# Altium PCB HIVE_SIGHT.PcbDoc (part 1 of 2)
Units mil, origin at the board's own origin, x right, y up, seen from the top; angles counter-clockwise.
Board outline 5769.33 x 2559.52 mil, 8 copper layers (Top, GND_1, Signal_1, GND_2, PWR, Signal_2, GND_3, Bottom), stack 52.4 mil thick; 132 components, 137 nets, 371 pads, 0 vias.
Unrouted connection lines stored in the file: 245.
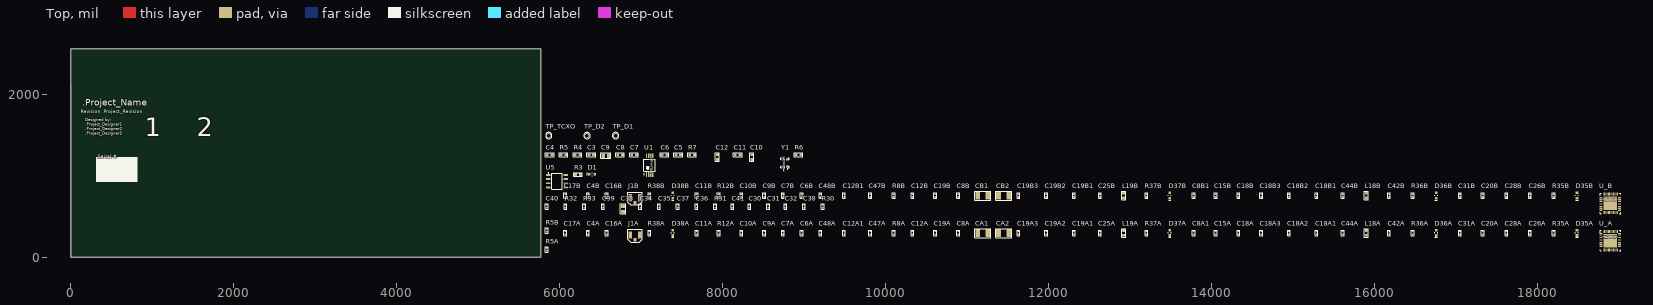
[diagram p0: Top view]
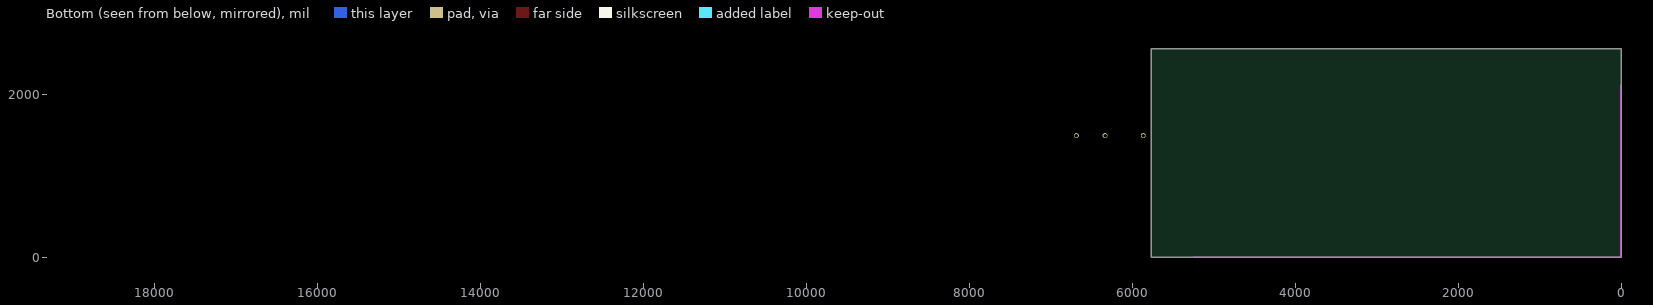
[diagram p1: Bottom view, seen from below]
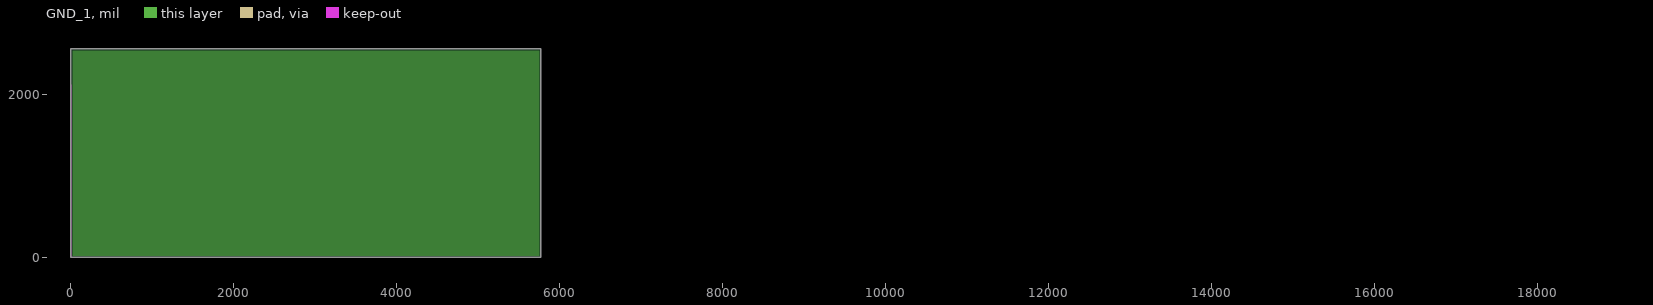
[diagram p2: GND_1, clearances drawn from the general rule]
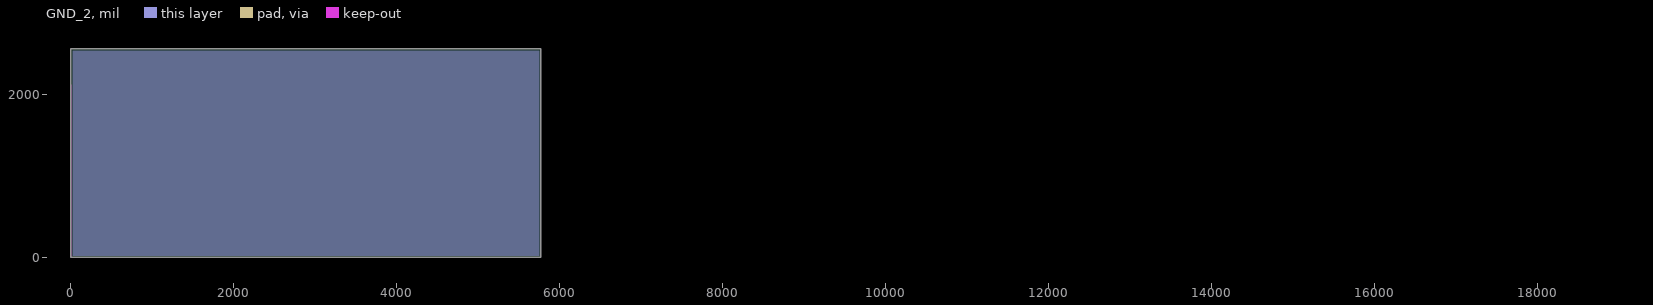
[diagram p3: GND_2, clearances drawn from the general rule]
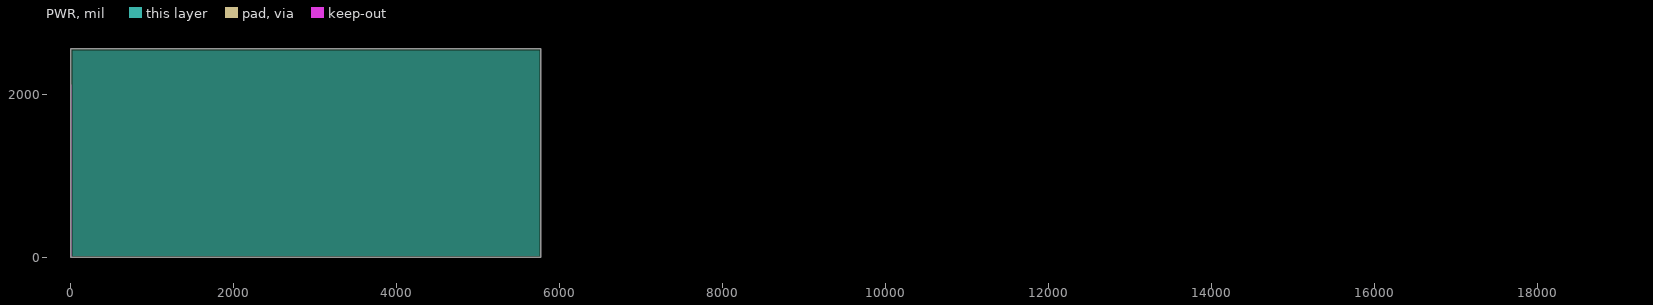
[diagram p4: PWR, clearances drawn from the general rule]
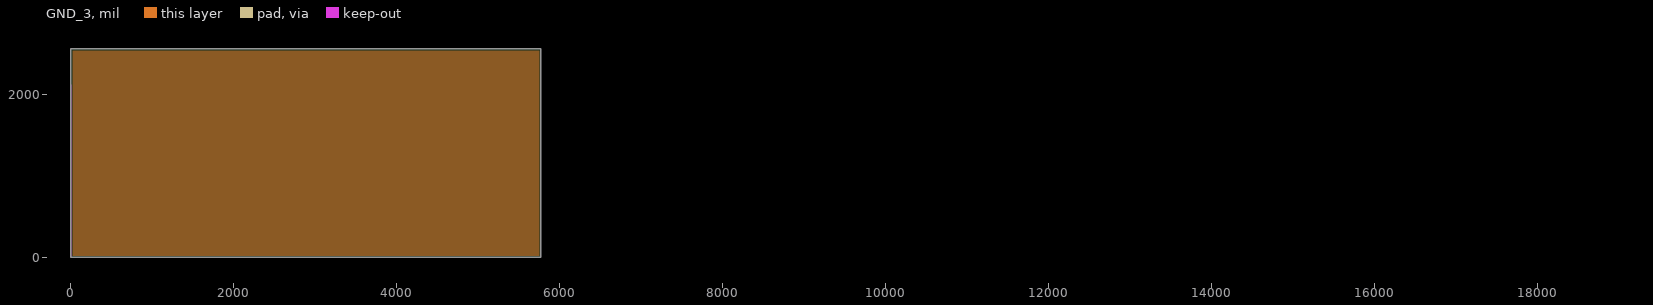
[diagram p5: GND_3, clearances drawn from the general rule]

## Layer stack, top to bottom
Top Solder: solder mask 1, Solder Resist, Dk 4
Top: signal copper 0.7
Dielectric 1: prepreg 2.8, PP-006, Dk 4.1
GND_1: plane copper 0.7
Dielectric 2: core 8, Core-009, Dk 4.5
Signal_1: signal copper 0.7
Dielectric 3: prepreg 8, PP-006, Dk 4.1
GND_2: plane copper 0.7
Dielectric 4: core 8, Core-009, Dk 4.5
PWR: plane copper 0.7
Dielectric 5: prepreg 8.3, PP-006, Dk 4.1
Signal_2: signal copper 0.7
Dielectric 6: core 8, Core-009, Dk 4.5
GND_3: plane copper 0.7
Dielectric 7: prepreg 3.7, PP-006, Dk 4.1
Bottom: signal copper 0.7
Bottom Solder: solder mask 0.6, Solder Resist, Dk 3.5

## Board outline
0,0 5769.33,0 5769.33,2559.52 0,2559.06

## Design rules (kind name [scope] priority, off if disabled: settings)
BoardOutlineClearance BoardOutlineClearance-Silk [(OnLayer('Bottom Overlay')) OR (OnLayer('Top Overlay'))] p1: gap=0 ignorepadtopadclearanceinfootprint=FALSE
BoardOutlineClearance BoardOutlineClearance-Fiducials [InComponentClass('Fiducials')] p2: gap=0 ignorepadtopadclearanceinfootprint=FALSE
BoardOutlineClearance BoardOutlineClearance-MouseBites [InComponentClass('MouseBites')] p3: gap=10 ignorepadtopadclearanceinfootprint=FALSE except(0: Arc-SplitContinuation Track-SplitContinuation SMDPad-SplitContinuation THPad-OutlineEdge THPad-CavityEdge THPad-CutoutEdge THPad-SplitBarrior THPad-SplitContinuation Via-SplitContinuation Fill-SplitContinuation Poly-SplitContinuation Region-OutlineEdge Region-CavityEdge Region-CutoutEdge Region-SplitBarrior Region-SplitContinuation Text-SplitContinuation; 20: Arc-OutlineEdge Track-OutlineEdge SMDPad-OutlineEdge Via-OutlineEdge Fill-OutlineEdge Poly-OutlineEdge Text-OutlineEdge)
BoardOutlineClearance [All] p4: gap=10 ignorepadtopadclearanceinfootprint=FALSE except(0: Arc-SplitContinuation Track-SplitContinuation SMDPad-SplitContinuation THPad-SplitContinuation Via-SplitContinuation Fill-SplitContinuation Poly-SplitContinuation Region-SplitContinuation Text-SplitContinuation)
Clearance Clearance_CON_TOP [(TouchesRoom('Ch0_Out_Down') OR TouchesRoom('Ch0_Out_Up') OR  TouchesRoom('Ch1_Out_Down') OR TouchesRoom('Ch1_Out_Up') OR  TouchesRoom('Ch2_Out_Down') OR TouchesRoom('Ch2_Out_Up') OR    TouchesRoom('Ch3_Out_Down') OR TouchesRoom('Ch3_Out_Up') OR    TouchesRoom('Ch4_Out_Down') OR TouchesRoom('Ch4_Out_Up') OR    TouchesRoom('Ch5_Out_Down') OR TouchesRoom('Ch5_Out_Up')   ) AND (InNetClass('HV') OR InNetClass('MID')) AND (OnTop OR OnMultiLayer) vs (TouchesRoom('Ch0_Out_Down') OR TouchesRoom('Ch0_Out_Up') OR  TouchesRoom('Ch1_Out_Down') OR TouchesRoom('Ch1_Out_Up') OR  TouchesRoom('Ch2_Out_Down') OR TouchesRoom('Ch2_Out_Up') OR    TouchesRoom('Ch3_Out_Down') OR TouchesRoom('Ch3_Out_Up') OR    TouchesRoom('Ch4_Out_Down') OR TouchesRoom('Ch4_Out_Up') OR    TouchesRoom('Ch5_Out_Down') OR TouchesRoom('Ch5_Out_Up')   ) AND (OnTop OR OnMultiLayer)] p1: gap=6 ignorepadtopadclearanceinfootprint=FALSE
Clearance Clearance_CON_BOT [(TouchesRoom('Ch0_In') OR TouchesRoom('Ch1_In') OR  TouchesRoom('Ch2_In') OR TouchesRoom('Ch3_In') OR  TouchesRoom('Ch4_In') OR TouchesRoom('Ch5_In') ) AND (InNetClass('HV') OR InNetClass('MID')) AND (OnBottom OR OnMultiLayer) vs (TouchesRoom('Ch0_In') OR TouchesRoom('Ch1_In') OR  TouchesRoom('Ch2_In') OR TouchesRoom('Ch3_In') OR  TouchesRoom('Ch4_In') OR TouchesRoom('Ch5_In'))   AND (OnBottom OR OnMultiLayer)] p2: gap=6 ignorepadtopadclearanceinfootprint=FALSE
Clearance Clearance_Via [IsVia vs (IsComponent AND NOT HasFootprint('REG_LDO_MIC5303-1.8YMT-TR'))] p3: gap=1 ignorepadtopadclearanceinfootprint=FALSE
Clearance HV-HV_EXT [InNetClass('HV') AND (OnTop OR OnBottom) vs InNetClass('HV') AND (OnTop OR OnBottom)] p4: gap=32 ignorepadtopadclearanceinfootprint=FALSE
Clearance HV-HV_INT [InNetClass('HV') vs InNetClass('HV')] p5: gap=16 ignorepadtopadclearanceinfootprint=FALSE
Clearance HV-MID_EXT [InNetClass('HV') AND (OnTop OR OnBottom) vs InNetClass('MID') AND (OnTop OR OnBottom)] p6: gap=16 ignorepadtopadclearanceinfootprint=FALSE
Clearance HV-MID_INT [InNetClass('HV') vs InNetClass('MID')] p7: gap=8 ignorepadtopadclearanceinfootprint=FALSE
Clearance HV-ALL_EXT [InNetClass('HV') AND (OnTop OR OnBottom) vs InNetClass('All Nets')] p8: gap=32 ignorepadtopadclearanceinfootprint=FALSE
Clearance HV-ALL_INT [InNetClass('HV') vs InNetClass('All Nets')] p9: gap=16 ignorepadtopadclearanceinfootprint=FALSE
Clearance MID-ALL_EXT [InNetClass('MID') AND (OnTop OR OnBottom) vs InNetClass('All Nets')] p10: gap=16 ignorepadtopadclearanceinfootprint=FALSE
Clearance MID_ALL_INT [InNetClass('MID') vs InNetClass('All Nets')] p11: gap=8 ignorepadtopadclearanceinfootprint=FALSE
Clearance [All] p12: gap=6 ignorepadtopadclearanceinfootprint=FALSE
ComponentClearance [All] p1: gap=4 collisioncheckmode=3 verticalgap=4 showdistances=FALSE
DiffPairsRouting [All] p1: maxlimit=6 minlimit=5 mostfreqgap=6 toplayer_mingap=6 toplayer_minwidth=4 toplayer_maxwidth=4 toplayer_prefwidth=4 midlayer1_maxgap=5 midlayer1_prefgap=5 midlayer1_minwidth=4 midlayer1_maxwidth=4 midlayer1_prefwidth=4 midlayer2_maxgap=5 midlayer2_prefgap=5 midlayer2_minwidth=4 midlayer2_maxwidth=4 midlayer2_prefwidth=4 bottomlayer_mingap=6 bottomlayer_minwidth=4 bottomlayer_maxwidth=4 bottomlayer_prefwidth=4 maxuncoupledlength=500
HoleSize [All] p1: absolutevalues=TRUE maxlimit=1000 minlimit=4 maxpercent=80.000 minpercent=20.000
HoleToHoleClearance HoleToHoleClearance_Via [All] p1: gap=16 allowstackedmicrovias=TRUE
HoleToHoleClearance [All] p2: gap=10 allowstackedmicrovias=TRUE
MatchedLengths DiffMatching_WithinPair [InDifferentialPairClass('All Differential Pairs')] p1: tolerance=1 checknetsindiffpair=TRUE checkdiffpairvsdiffpair=FALSE checkxsignals=FALSE checkothers=FALSE
MatchedLengths CHANNEL_0 [InxSignalClass('xSignals_J1A_J2A')] p2: tolerance=5 checknetsindiffpair=FALSE checkdiffpairvsdiffpair=TRUE checkxsignals=TRUE checkothers=TRUE
MatchedLengths CHANNEL_1 [InxSignalClass('xSignals_J1B_J2B')] p3: tolerance=5 checknetsindiffpair=FALSE checkdiffpairvsdiffpair=TRUE checkxsignals=TRUE checkothers=TRUE
MatchedLengths CHANNEL_2 [InxSignalClass('xSignals_J1C_J2C')] p4: tolerance=5 checknetsindiffpair=FALSE checkdiffpairvsdiffpair=TRUE checkxsignals=TRUE checkothers=TRUE
MatchedLengths CHANNEL_3 [InxSignalClass('xSignals_J1D_J2D')] p5: tolerance=5 checknetsindiffpair=FALSE checkdiffpairvsdiffpair=TRUE checkxsignals=TRUE checkothers=TRUE
MatchedLengths CHANNEL_4 [InxSignalClass('xSignals_J1E_J2E')] p6: tolerance=5 checknetsindiffpair=FALSE checkdiffpairvsdiffpair=TRUE checkxsignals=TRUE checkothers=TRUE
MatchedLengths CHANNEL_5 [InxSignalClass('xSignals_J1F_J2F')] p7: tolerance=5 checknetsindiffpair=FALSE checkdiffpairvsdiffpair=TRUE checkxsignals=TRUE checkothers=TRUE
MinimumSolderMaskSliver [All] p1: minsoldermaskwidth=3.9
PlaneClearance PlaneClearance_HV [InNetClass('HV')] p1: clearance=10
PlaneClearance PlaneClearance_HV_MID [InNet('-HV_MID')] p2: clearance=8
PlaneClearance [All] p3: clearance=6
PlaneConnect [All] p1: pad.planeconnectstyle=Relief pad.reliefexpansion=20 pad.reliefentries=4 pad.reliefconductorwidth=10 pad.reliefairgap=10 via.planeconnectstyle=Direct via.reliefexpansion=20 via.reliefentries=4 via.reliefconductorwidth=10 via.reliefairgap=10
PolygonConnect [All] p1: thpad.connectstyle=Relief thpad.reliefconductorwidth=10 thpad.reliefentries=4 thpad.polygonreliefangle="90 Angle" thpad.airgapwidth=10 smdpad.connectstyle=Direct smdpad.reliefconductorwidth=10 smdpad.reliefentries=4 smdpad.polygonreliefangle="90 Angle" smdpad.airgapwidth=10 via.connectstyle=Direct via.reliefconductorwidth=10 via.reliefentries=4 via.polygonreliefangle="90 Angle" via.airgapwidth=10
RoomDefinition DECAWAVE_3 [InComponentClass('DECAWAVE')] p1: confinementstyle=ConfineIn formatcopy=TRUE lockcomponents=FALSE outline 5814.32,819.34 6460.32,819.34 6460.32,1151.34 5814.32,1151.34
RoomDefinition DECAWAVE [InComponentClass('DECAWAVE')] p2: confinementstyle=ConfineIn formatcopy=TRUE lockcomponents=FALSE outline 5814.32,972.34 8999.32,972.34 8999.32,1394.34 5814.32,1394.34
RoomDefinition DECAWAVE [InComponentClass('DECAWAVE')] p3: confinementstyle=ConfineIn formatcopy=TRUE lockcomponents=FALSE outline 5814.32,972.34 8999.32,972.34 8999.32,1394.34 5814.32,1394.34
RoutingVias [All] p1: holewidth=10 width=18 viastyle="Through Hole" minholewidth=10 minwidth=18 maxholewidth=10 maxwidth=30
SilkToSilkClearance [All] p1: silktosilkclearance=1
SilkToSolderMaskClearance [IsPad] p1: minsilkscreentomaskgap=1 clearancetoexposedcopper=FALSE
SolderMaskExpansion [All] p1: expansion=2 istentingtop=FALSE
Width Width_POW [InNetClass('POWER')] p1: maxlimit=32 minlimit=6 preferedwidth=8 minimp=50.000000 maximp=50.000000 favimp=50.000000
Width [All] p2: maxlimit=6 minlimit=5.5 preferedwidth=6 toplayer_maxwidth=5.5 toplayer_prefwidth=5.5 midlayer1_minwidth=6 midlayer2_minwidth=6 bottomlayer_maxwidth=5.5 bottomlayer_prefwidth=5.5 minimp=50.000000 maximp=50.000000 favimp=50.000000
21 further rules are at their usual default settings.

## Classes and differential pairs
component class TOP: MEC?
component class POWER: TP_D1 TP_D2 TP_TCXO
component class DECAWAVE: C3 C4 C5 C6 C7 C8 C9 C10 C11 C12 D1 R3 R4 R5 R6 R7 U2 U3 U5

## Components (designator, comment, footprint, x,y, rotation, side; value= is the part's Value field where it differs from the comment)
C3 "0805YD106KAT2A" CAP_CER_0603 6387.32,1260.34 r0 top value=10uF
C4 "C0603C105K8PACTU" CAP_CER_0603 5877.32,1260.34 r0 top value=1uF
C4A "CC0402JRNPO9BN101" CAP_CER_0402 6348.32,301.34 r90 top value=100pF
C4B "CC0402JRNPO9BN101" CAP_CER_0402 6348.32,759.34 r90 top value=100pF
C5 "CC0603KRX7R8BB104" CAP_CER_0603 7455.32,1260.34 r0 top value=0.1uF
C6 "CC0603KRX7R8BB104" CAP_CER_0603 7285.32,1260.34 r0 top value=0.1uF
C6A "CGA2B3X7R1E104K050BB" CAP_CER_0402 8971.32,301.34 r90 top value=100nF
C6B "CGA2B3X7R1E104K050BB" CAP_CER_0402 8971.32,759.34 r90 top value=100nF
C7 "CC0603KRX7R8BB104" CAP_CER_0603 6913.32,1260.34 r0 top value=0.1uF
C7A "CGA2B3X7R1E104K050BB" CAP_CER_0402 8741.32,301.34 r90 top value=100nF
C7B "CGA2B3X7R1E104K050BB" CAP_CER_0402 8741.32,759.34 r90 top value=100nF
C8 "C0603C105K8PACTU" CAP_CER_0603 6742.32,1260.34 r0 top value=1uF
C8A "C0402C129C5GACTU" CAP_CER_0402 10891.32,301.34 r90 top value=1.2pF
C8A1 "CC0402CRNPO9BN3R0" CAP_CER_0402 13782.32,301.34 r90 top value=3pF
C8B "C0402C129C5GACTU" CAP_CER_0402 10891.32,759.34 r90 top value=1.2pF
C8B1 "CC0402CRNPO9BN3R0" CAP_CER_0402 13782.32,759.34 r90 top value=3pF
C9 "CC0603KRX7R8BB104" CAP_CER_0805 6567.32,1249.34 r0 top value=0.1uF
C9A "CGA2B3X7R1E104K050BB" CAP_CER_0402 8511.32,301.34 r90 top value=100nF
C9B "CGA2B3X7R1E104K050BB" CAP_CER_0402 8511.32,759.34 r90 top value=100nF
C10 "CC0603KRX7R8BB104" CAP_CER_0603 8356.32,1231.34 r90 top value=0.1uF
C10A "CGA2B3X7R1E104K050BB" CAP_CER_0402 8231.32,301.34 r90 top value=100nF
C10B "CGA2B3X7R1E104K050BB" CAP_CER_0402 8231.32,759.34 r90 top value=100nF
C11 "CC0603JRNPO9BN101" CAP_CER_0603 8185.32,1260.34 r0 top value=100pF
C11A "CGA2B3X7R1E104K050BB" CAP_CER_0402 7682.32,301.34 r90 top value=100nF
C11B "CGA2B3X7R1E104K050BB" CAP_CER_0402 7682.32,759.34 r90 top value=100nF
C12 "C0603C105K8PACTU" CAP_CER_0603 7936.32,1231.34 r90 top value=1uF
C12A "GRM1555C1H180GA01D" CAP_CER_0402 10331.32,301.34 r90 top value=18pF
C12A1 "CC0402KRX7R9BB821" CAP_CER_0402 9491.32,301.34 r90 top value=820pF
C12B "GRM1555C1H180GA01D" CAP_CER_0402 10331.32,759.34 r90 top value=18pF
C12B1 "CC0402KRX7R9BB821" CAP_CER_0402 9491.32,759.34 r90 top value=820pF
C15A "CGA2B3X7R1E104K050BB" CAP_CER_0402 14052.32,301.34 r90 top value=100nF
C15B "CGA2B3X7R1E104K050BB" CAP_CER_0402 14052.32,759.34 r90 top value=100nF
C16A "CC0402JRNPO9BN120" CAP_CER_0402 6578.32,301.34 r90 top value=12pF
C16B "CC0402JRNPO9BN120" CAP_CER_0402 6578.32,759.34 r90 top value=12pF
C17A "CC0402JRNPO9BN120" CAP_CER_0402 6068.32,301.34 r90 top value=12pF
C17B "CC0402JRNPO9BN120" CAP_CER_0402 6068.32,759.34 r90 top value=12pF
C18A "CC0402JRNPO9BN120" CAP_CER_0402 14332.32,301.34 r90 top value=12pF
C18A1 "CC0402KRX7R9BB102" CAP_CER_0402 15291.32,301.34 r90 top value=1nF
C18A2 "CL05B103KB5NFNC" CAP_CER_0402 14952.32,301.34 r90 top value=10nF
C18A3 "CGA2B3X7R1E104K050BB" CAP_CER_0402 14612.32,301.34 r90 top value=100nF
C18B "CC0402JRNPO9BN120" CAP_CER_0402 14332.32,759.34 r90 top value=12pF
C18B1 "CC0402KRX7R9BB102" CAP_CER_0402 15291.32,759.34 r90 top value=1nF
C18B2 "CL05B103KB5NFNC" CAP_CER_0402 14952.32,759.34 r90 top value=10nF
C18B3 "CGA2B3X7R1E104K050BB" CAP_CER_0402 14612.32,759.34 r90 top value=100nF
C19A "CC0402JRNPO9BN120" CAP_CER_0402 10611.32,301.34 r90 top value=12pF
C19A1 "CC0402KRX7R9BB102" CAP_CER_0402 12312.32,301.34 r90 top value=1nF
C19A2 "CL05B103KB5NFNC" CAP_CER_0402 11972.32,301.34 r90 top value=10nF
C19A3 "CGA2B3X7R1E104K050BB" CAP_CER_0402 11632.32,301.34 r90 top value=100nF
C19B "CC0402JRNPO9BN120" CAP_CER_0402 10611.32,759.34 r90 top value=12pF
C19B1 "CC0402KRX7R9BB102" CAP_CER_0402 12312.32,759.34 r90 top value=1nF
C19B2 "CL05B103KB5NFNC" CAP_CER_0402 11972.32,759.34 r90 top value=10nF
C19B3 "CGA2B3X7R1E104K050BB" CAP_CER_0402 11632.32,759.34 r90 top value=100nF
C20A "CGA2B3X7R1E104K050BB" CAP_CER_0402 17331.32,301.34 r90 top value=100nF
C20B "CGA2B3X7R1E104K050BB" CAP_CER_0402 17331.32,759.34 r90 top value=100nF
C25A "CGA2B3X7R1E104K050BB" CAP_CER_0402 12632.32,301.34 r90 top value=100nF
C25B "CGA2B3X7R1E104K050BB" CAP_CER_0402 12632.32,759.34 r90 top value=100nF
C26A "CGA2B3X7R1E104K050BB" CAP_CER_0402 17911.32,301.34 r90 top value=100nF
C26B "CGA2B3X7R1E104K050BB" CAP_CER_0402 17911.32,759.34 r90 top value=100nF
C28A "CGA2B3X7R1E104K050BB" CAP_CER_0402 17621.32,301.34 r90 top value=100nF
C28B "CGA2B3X7R1E104K050BB" CAP_CER_0402 17621.32,759.34 r90 top value=100nF
C30 "CL05A105KL5NRNC" CAP_CER_0402 8330.32,627.34 r90 top value=1uF
C31 "CL05A104KA5NNNC" CAP_CER_0402 8560.32,627.34 r90 top value=100nF
C31A "CGA2B3X7R1E104K050BB" CAP_CER_0402 17051.32,301.34 r90 top value=100nF
C31B "CGA2B3X7R1E104K050BB" CAP_CER_0402 17051.32,759.34 r90 top value=100nF
C32 "C0402C103M5RACTU" CAP_CER_0402 8770.32,627.34 r90 top value=10nF
C33 "GRM21BC71E106KE11L" CAP_CER_0805 6779.32,596.34 r90 top value=10uF
C34 "CL05A105KL5NRNC" CAP_CER_0402 6990.32,627.34 r90 top value=1uF
C35 "CL05A104KA5NNNC" CAP_CER_0402 7220.32,627.34 r90 top value=100nF
C36 "C0402C103M5RACTU" CAP_CER_0402 7680.32,627.34 r90 top value=10nF
C37 "C0402C103M5RACTU" CAP_CER_0402 7450.32,627.34 r90 top value=10nF
C38 "CC0402KRX7R9BB102" CAP_CER_0402 9000.32,627.34 r90 top value=1nF
C39 "CL05A104KA5NNNC" CAP_CER_0402 6530.32,627.34 r90 top value=100nF
C40 "CL05A104KA5NNNC" CAP_CER_0402 5840.32,627.34 r90 top value=100nF
C41 "CC0402CRNPO9BN3R0" CAP_CER_0402 8120.32,627.34 r90 top value=3pF
C42A "CGA2B3X7R1E104K050BB" CAP_CER_0402 16181.32,301.34 r90 top value=100nF
C42B "CGA2B3X7R1E104K050BB" CAP_CER_0402 16181.32,759.34 r90 top value=100nF
C44A "CGA2B3X7R1E104K050BB" CAP_CER_0402 15611.32,301.34 r90 top value=100nF
C44B "CGA2B3X7R1E104K050BB" CAP_CER_0402 15611.32,759.34 r90 top value=100nF
C47A "CGA2B3X7R1E104K050BB" CAP_CER_0402 9811.32,301.34 r90 top value=100nF
C47B "CGA2B3X7R1E104K050BB" CAP_CER_0402 9811.32,759.34 r90 top value=100nF
C48A "CGA2B3X7R1E104K050BB" CAP_CER_0402 9201.32,301.34 r90 top value=100nF
C48B "CGA2B3X7R1E104K050BB" CAP_CER_0402 9201.32,759.34 r90 top value=100nF
CA1 "C3225X7R1E226M250AB" CAP_CER_1210 11195.32,299.34 r0 top value=22uF
CA2 "C3225X7R1E226M250AB" CAP_CER_1210 11451.32,299.34 r0 top value=22uF
CB1 "C3225X7R1E226M250AB" CAP_CER_1210 11195.32,757.34 r0 top value=22uF
CB2 "C3225X7R1E226M250AB" CAP_CER_1210 11451.32,757.34 r0 top value=22uF
D1 "SML-D12P8WT86" LED_SML-D12P8WT86 6397.32,1021.34 r0 top value="560 nm (green)"
D35A "SML-D12P8WT86" LED_SML-D12P8WT86 18487.32,301.34 r90 top value="560 nm (green)"
D35B "SML-D12P8WT86" LED_SML-D12P8WT86 18487.32,759.34 r90 top value="560 nm (green)"
D36A "SML-D12P8WT86" LED_SML-D12P8WT86 16757.32,301.34 r90 top value="560 nm (green)"
D36B "SML-D12P8WT86" LED_SML-D12P8WT86 16757.32,759.34 r90 top value="560 nm (green)"
D37A "SML-D12P8WT86" LED_SML-D12P8WT86 13488.32,301.34 r90 top value="560 nm (green)"
D37B "SML-D12P8WT86" LED_SML-D12P8WT86 13488.32,759.34 r90 top value="560 nm (green)"
D38A "SML-D12P8WT86" LED_SML-D12P8WT86 7388.32,301.34 r90 top value="560 nm (green)"
D38B "SML-D12P8WT86" LED_SML-D12P8WT86 7388.32,759.34 r90 top value="560 nm (green)"
J1A "128-0711-201" CON_UMC_128-0711-201 6926.32,274.34 r0 top value="50 Ohm, 6 GHz"
J1B "128-0711-201" CON_UMC_128-0711-201 6926.32,732.34 r0 top value="50 Ohm, 6 GHz"
L18A "BLM15AG601SN1D" FER_0603 15901.32,301.34 r90 top value=600R@100Mhz
L18B "BLM15AG601SN1D" FER_0603 15901.32,759.34 r90 top value=600R@100Mhz
L19A "BLM15AG601SN1D" FER_0603 12922.32,301.34 r90 top value=600R@100Mhz
L19B "BLM15AG601SN1D" FER_0603 12922.32,759.34 r90 top value=600R@100Mhz
R3 "CRCW0603470RFKEAC" RES_0603 6224.32,1017.34 r0 top value=470R
R4 "RR0816P-103-D" RES_0603 6217.32,1260.34 r0 top value=10k
R5 "RC0603JR-070RL" RES_0603 6047.32,1260.34 r0 top value=0R
R5A "RC0402FR-0711KL" RES_0402 5840.32,98.34 r90 top value=11k
R5B "RC0402FR-0711KL" RES_0402 5840.32,332.34 r90 top value=11k
R6 "RC0603FR-071KL" RES_0603 8931.32,1260.34 r0 top value=1K
R7 "RC0402FR- XXXXX" RES_0603 7625.32,1260.34 r0 top value=TBD
R8A "RC0402FR-0716KL" RES_0402 10101.32,301.34 r90 top value=16k
R8B "RC0402FR-0716KL" RES_0402 10101.32,759.34 r90 top value=16k
R12A "RC0402FR-07270RL" RES_0402 7952.32,301.34 r90 top value=270
R12B "RC0402FR-07270RL" RES_0402 7952.32,759.34 r90 top value=270
R30 "RC0402FR-0720KL" RES_0402 9230.32,627.34 r90 top value=20k
R31 "RC0402FR-0720KL" RES_0402 7910.32,627.34 r90 top value=20k
R32 "RC0402FR-070RL" RES_0402 6070.32,627.34 r90 top value=0R
R33 "RC0402FR-070RL" RES_0402 6300.32,627.34 r90 top value=0R
R35A "RC0402FR-07470RL" RES_0402 18201.32,301.34 r90 top value=470
R35B "RC0402FR-07470RL" RES_0402 18201.32,759.34 r90 top value=470
R36A "RC0402FR-07470RL" RES_0402 16471.32,301.34 r90 top value=470
R36B "RC0402FR-07470RL" RES_0402 16471.32,759.34 r90 top value=470
R37A "RC0402FR-07470RL" RES_0402 13202.32,301.34 r90 top value=470
R37B "RC0402FR-07470RL" RES_0402 13202.32,759.34 r90 top value=470
R38A "RC0402FR-07470RL" RES_0402 7102.32,301.34 r90 top value=470
R38B "RC0402FR-07470RL" RES_0402 7102.32,759.34 r90 top value=470
TP_D1 "100MIL" TPO_TH_ROUND_100MIL 6686.32,1495.34 r90 top
TP_D2 "100MIL" TPO_TH_ROUND_100MIL 6335.32,1495.34 r90 top
TP_TCXO "100MIL" TPO_TH_ROUND_100MIL 5865.32,1495.34 r90 top
U1 "LMK1C1102PWR" COM_BUF_LMK1C1102PWR 7104.32,1133.34 r90 top
U5 "MX25L3233FZNI-08G" MEM_EEP_CAT24C32WI-GT3 5968.32,935.34 r0 top value="32Mb (8M x 4)"
U_A "DW1000-I-TR13" COM_XRC_DW1000-I-TR13 18896.32,205.34 r0 top
U_B "DW1000-I-TR13" COM_XRC_DW1000-I-TR13 18896.32,663.34 r0 top
Y1 "ASTXR-12-38.400MHz-514054-T" OSC_ASTXR-12-38.400MHZ-514054-T 8768.32,1159.34 r90 top value=38.4MHz

## Footprints (in the part's own frame and the unit in brackets; to place one, negate y for a bottom-side part, rotate by r counter-clockwise, add the part's x,y. Pads: shape width x height; smd on the part's side, far side on the other; paste and mask are expansions set on the pad)
CAP_CER_0402 [mil] "Ceramic Capacitor - 0402"
  rrect60% 20x20 smd paste+0 mask+1.97: 1(-17.5,0) 2(17.5,0)
  silkscreen extent -33,-17 33,17, body extent -19,-10 20,10, height 20
CAP_CER_0603 [mil] "Ceramic Capacitor - 0603"
  rrect35% 35x34 smd paste+0 mask+1.97: 1(-29.5,0) 2(29.5,0)
  silkscreen extent -53,-24 53,24, body extent -31,-16 31,16, height 35
CAP_CER_0805 [mil] "Ceramic Capacitor - 0805"
  rrect37% 43x55 smd paste+0 mask+1.97: 1(-33.5,0) 2(33.5,0)
  silkscreen extent -61,-33 61,33, body extent -39,-24 40,25, height 49
CAP_CER_1210 [mm] "Ceramic Capacitor - 1210"
  rrect40% 1.5x2.5 smd paste+0 mask+0.05: 1(-1.6,0) 2(1.6,0)
  silkscreen extent -2.5,-1.4 2.5,1.4, body extent -1.57,-1.24 1.63,1.26, height 2.5
COM_BUF_LMK1C1102PWR [mm] "TSOP, 8-Leads, Body 3,00x4,40mm, Pitch 0,65mm, IPC Medium Density"
  rrect20% 1.5x0.45 smd mask+0.05: 1(-2.9,0.975) 2(-2.9,0.325) 3(-2.9,-0.325) 4(-2.9,-0.975) 5(2.9,-0.975) 6(2.9,-0.325) 7(2.9,0.325) 8(2.9,0.975)
  silkscreen extent -3.02,-1.8 1.85,1.87, body extent -3.2,-1.55 3.2,1.55, height 1.2
COM_XRC_DW1000-I-TR13 [mm] "QFN 48 package, 0.5mm pitch"
  rect 0.95x0.2 smd mask+0.125: 1(-2.9,2.2) 2(-2.9,1.8) 3(-2.9,1.4) 4(-2.9,1) 5(-2.9,0.6) 6(-2.9,0.2) 7(-2.9,-0.2) 8(-2.9,-0.6) 9(-2.9,-1) 10(-2.9,-1.4) 11(-2.9,-1.8) 12(-2.9,-2.2) 25(2.9,-2.2) 26(2.9,-1.8) 27(2.9,-1.4) 28(2.9,-1) 29(2.9,-0.6) 30(2.9,-0.2) 31(2.9,0.2) 32(2.9,0.6) 33(2.9,1) 34(2.9,1.4) 35(2.9,1.8) 36(2.9,2.2)
  rect 0.2x0.95 smd mask+0.125: 13(-2.2,-2.9) 14(-1.8,-2.9) 15(-1.4,-2.9) 16(-1,-2.9) 17(-0.6,-2.9) 18(-0.2,-2.9) 19(0.2,-2.9) 20(0.6,-2.9) 21(1,-2.9) 22(1.4,-2.9) 23(1.8,-2.9) 24(2.2,-2.9) 37(2.2,2.9) 38(1.8,2.9) 39(1.4,2.9) 40(1,2.9) 41(0.6,2.9) 42(0.2,2.9) 43(-0.2,2.9) 44(-0.6,2.9) 45(-1,2.9) 46(-1.4,2.9) 47(-1.8,2.9) 48(-2.2,2.9)
  rect 4.2x4.2 smd: 49(0,0)
  silkscreen extent -3.27,-3.2 3.2,3.2, body extent -3.05,-3.05 3.05,3.05, height 0.9
CON_UMC_128-0711-201 [mil]
  rect 39x41 smd paste-0.98 mask+1.97: 1(0,-59.5)
  rect 41x87 smd paste-0.98 mask+1.97: 2(-58,0) 3(58,0)
  silkscreen extent -89,-89 89,69, body extent -59,-61 59,85, height 68
FER_0603 [mil] "Ferrite - 0603"
  rrect35% 35x34 smd paste+0 mask+1.97: 1(-29.5,0) 2(29.5,0)
  silkscreen extent -53,-24 53,24, body extent -31,-16 32,16, height 31
LED_SML-D12P8WT86 [mm] "0603"
  rect 0.8x0.8 smd paste-0.025 mask+0.07: A(0.825,0) K(-0.825,0)
  silkscreen extent -1.45,-0.48 0.13,0.48, body extent -0.8,-0.4 0.8,0.4, height 0.6
MEM_EEP_CAT24C32WI-GT3 [mm] "SOIC, 8-Leads, Body 4,90x3,90mm, Pitch 1,27mm, IPC Medium Density"
  rrect50% 1.45x0.6 smd paste+0 mask+0.1: 1(-2.725,1.905) 2(-2.725,0.635) 3(-2.725,-0.635) 4(-2.725,-1.905) 5(2.725,-1.905) 6(2.725,-0.635) 7(2.725,0.635) 8(2.725,1.905)
  silkscreen extent -2.76,-2.5 1.6,2.64, body extent -3,-2.5 3,2.5, height 1.75
OSC_ASTXR-12-38.400MHZ-514054-T [mm]
  rect 0.63x0.85 smd: 1(-1.04,-0.7) 3(1.04,-0.7) 4(1.04,0.7) 6(-1.04,0.7)
  silkscreen extent -2,-1.31 1.56,1.32, body extent -1.25,-1 1.25,1, height 0.85
RES_0402 [mil] "Resistor - 0402"
  rrect60% 20x20 smd paste+0 mask+1.97: 1(-17.5,0) 2(17.5,0)
  silkscreen extent -33,-17 33,17, body extent -20,-10 20,10, height 13
RES_0603 [mil] "Resistor - 0603"
  rrect35% 35x34 smd paste+0 mask+1.97: 1(-29.5,0) 2(29.5,0)
  silkscreen extent -53,-24 53,24, body extent -31,-16 32,16, height 17
TPO_TH_ROUND_100MIL [mil]
  round 60 hole 42.91 mask+4: 1(0,0)
  silkscreen extent -39,-39 39,39

## Part data
C3: library part CAP_CER_0805YD106KAT2A, "CAP - CER 10UF 16V X5R - 0805", Manufacturer #1="AVX Corporation", Package=0805, Supplier Part Number 1=478-5165-1-ND, Temperature="-55°C ~ 85°C", Tolerance=10%, Voltage Rating=16V, Assembly Type=SMD, CreatedBy/Date="L-P Gauthier / 2018-05-29", Cryo=UNKNOWN, GRAMS Lib Spec=2.8, HelpURL=http://datasheets.avx.com/cx5r.pdf, Magnetic Material=Unknown, Part Number #1=0805YD106KAT2A, Polarized=No, Supplier 1=Digi-Key, VerifiedBy="Caroline Paulin - 27 sept 2018"
C4 C8 C12: library part CAP_CER_C0603C105K8PACTU, "CAP - CER 1uF 10V X5R 10% - 0603", Manufacturer #1=KEMET, Package=0603, Supplier Part Number 1=399-3118-1-ND, Temperature="-55°C ~ 85°C", Tolerance=10%, Voltage Rating=10V, Assembly Type=SMD, CreatedBy/Date="Hubert Dube - 21/07/20", Cryo=UNKNOWN, GRAMS Lib Spec=2.8, HelpURL=https://content.kemet.com/datasheets/KEM_C1006_X5R_SMD.pdf, Magnetic Material=Unknown, Part Number #1=C0603C105K8PACTU, Polarized=NO, Supplier 1=Digi-Key, VerifiedBy="Louis-Daniel Gaulin - 21/07/20"
C4A C4B: library part CAP_CER_CC0402JRNPO9BN101, "CAP - CER 100pF 50V ±5% 1/16W C0G,CP0 - 0402", Manufacturer #1=Yageo, Package=0402, Power Max=1/16W, Supplier Part Number 1=311-1024-6-ND, Temperature="-55°C ~ 125°C", Tolerance=±5%, Voltage Rating=50V, Assembly Type=SMD, CreatedBy/Date="Philippe Arsenault/ 2020-07-24", Cryo=UNKNOWN, GRAMS Lib Spec=2.8, HelpURL=https://www.yageo.com/upload/media/product/productsearch/datasheet/mlcc/UPY-GPHC_X7R_6.3V-to-50V_18.pdf, Magnetic Material=Unknown, Part Number #1=CC0402JRNPO9BN101, Polarized=NO, Supplier 1=Digi-Key
C5 C6 C7 C9 C10: library part CAP_CER_CC0603KRX7R8BB104, "CAP - CER 0.1uF 25V X7R 10% - 0603", Manufacturer #1=Yageo, Package=0603, Supplier Part Number 1=311-1341-2-ND, Temperature="-55°C ~ 125°C", Tolerance=10%, Voltage Rating=25V, Assembly Type=SMD, CreatedBy/Date="Hubert Dube - 21/07/20", Cryo=UNKNOWN, GRAMS Lib Spec=2.8, HelpURL=https://www.yageo.com/upload/media/product/productsearch/datasheet/mlcc/UPY-GPHC_X7R_6.3V-to-50V_18.pdf, Magnetic Material=Unknown, Part Number #1=CC0603KRX7R8BB104, Polarized=NO, Supplier 1=Digi-Key, VerifiedBy="Louis-Daniel Gaulin - 21/07/20"
C6A C6B C7A C7B C9A C9B C10A C10B C11A C11B C15A C15B C18A3 C18B3 C19A3 C19B3 C20A C20B C25A C25B C26A C26B C28A C28B C31A C31B C42A C42B C44A C44B C47A C47B C48A C48B: library part CAP_CER_CGA2B3X7R1E104K050BB, "CAP - CER 0.1µF 10% 25V X7R - 0402", Manufacturer #1="TDK Corporation", Package=0402, Supplier Part Number 1=445-6902-1-ND, Temperature="-55°C ~ 125°C", Tolerance=10%, Voltage Rating=25V, Assembly Type=SMD, CreatedBy/Date="Nicolas Roy 2018-11-07", Cryo=UNKNOWN, GRAMS Lib Spec=2.8, HelpURL=https://product.tdk.com/info/en/catalog/datasheets/mlcc_automotive_general_en.pdf, Magnetic Material=Unknown, Part Number #1=CGA2B3X7R1E104K050BB, Polarized=NO, Supplier 1=Digi-Key, VerifiedBy="Nicolas V. (2019-01-22)"
C8A C8B: library part CAP_CER_C0402C129C5GACTU, "CAP - CER 1.2pF 50V ±0.25pF 1/16W C0G, NP0 - 0402", Manufacturer #1=KEMET, Package=0402, Power Max=1/16W, Supplier Part Number 1=399-1001-1-ND, Temperature="-55°C ~ 125°C", Tolerance=±0.25pF, Voltage Rating=50V, Assembly Type=SMD, CreatedBy/Date="Philippe Arsenault/ 2020-07-24", Cryo=UNKNOWN, GRAMS Lib Spec=2.8, HelpURL=https://content.kemet.com/datasheets/KEM_C1003_C0G_SMD.pdf, Magnetic Material=Unknown, Part Number #1=C0402C129C5GACTU, Polarized=NO, Supplier 1=Digi-Key
C8A1 C8B1: library part CAP_CER_CC0402JRNPO9BN270, "CAP - CER 27pF 50V ±5% 1/16W C0G, NP0 - 0402", Manufacturer #1=Yageo, Package=0402, Power Max=1/16W, Supplier Part Number 1=311-1007-1-ND, Temperature="-55°C ~ 125°C", Tolerance=±0.25pF, Voltage Rating=50V, Assembly Type=SMD, CreatedBy/Date="Philippe Arsenault/ 2020-07-24", Cryo=UNKNOWN, GRAMS Lib Spec=2.8, HelpURL=https://www.yageo.com/upload/media/product/productsearch/datasheet/mlcc/UPY-GP_NP0_16V-to-50V_18.pdf, Magnetic Material=Unknown, Part Number #1=CC0402CRNPO9BN3R0, Polarized=NO, Supplier 1=Digi-Key
C11: library part CAP_CER_CC0603JRNPO9BN101, "CAP - CER 100pF 50V C0G 5% - 0603", Manufacturer #1=Yageo, Package=0603, Supplier Part Number 1=311-1069-1-ND, Temperature="-55°C ~ 125°C", Tolerance=5%, Voltage Rating=50V, Assembly Type=SMD, CreatedBy/Date="Hubert Dube - 21/07/20", Cryo=UNKNOWN, GRAMS Lib Spec=2.8, HelpURL=https://www.yageo.com/upload/media/product/productsearch/datasheet/mlcc/UPY-GP_NP0_16V-to-50V_18.pdf, Magnetic Material=Unknown, Part Number #1=CC0603JRNPO9BN101, Polarized=NO, Supplier 1=Digi-Key, VerifiedBy="Louis-Daniel Gaulin - 21/07/20"
C12A C12B: library part CAP_CER_GRM1555C1H180GA01D, "CAP - CER 18pF 50V C0G, NPO - 0402", Manufacturer #1="Murata Electronics North America", Package=0402, Supplier Part Number 1=490-6204-1-ND, Temperature="-55°C ~ 125°C", Tolerance=2%, Voltage Rating=50V, Assembly Type=SMD, CreatedBy/Date="Tommy Rossignol / 2018-11-20", Cryo=UNKNOWN, GRAMS Lib Spec=2.8, HelpURL=https://psearch.en.murata.com/capacitor/product/GRM1555C1H180GA01%23.html, Magnetic Material=UNKNOWN, Note="Not for new Design", Part Number #1=GRM1555C1H180GA01D, Polarized=NO, Supplier 1=Digi-Key, VerifiedBy="Caroline Paulin - 13 fév 2019"
C12A1 C12B1: library part CAP_CER_CC0402KRX7R9BB821, "CAP - CER 820pF 50V ±10% 1/16W X7R - 0402", Manufacturer #1=Yageo, Package=0402, Power Max=1/16W, Supplier Part Number 1=311-1727-1-ND, Temperature="-55°C ~ 125°C", Tolerance=±10%, Voltage Rating=50V, Assembly Type=SMD, CreatedBy/Date="Philippe Arsenault/ 2020-07-24", Cryo=UNKNOWN, GRAMS Lib Spec=2.8, HelpURL=https://www.yageo.com/upload/media/product/productsearch/datasheet/mlcc/UPY-GPHC_X7R_6.3V-to-50V_18.pdf, Magnetic Material=Unknown, Part Number #1=CC0402KRX7R9BB821, Polarized=NO, Supplier 1=Digi-Key
C16A C16B C17A C17B C18A C18B C19A C19B: library part CAP_CER_CC0402JRNPO9BN120, "CAP - CER 12pF 50V ±5% 1/16W C0G, NP0 - 0402", Manufacturer #1=Yageo, Package=0402, Power Max=1/16W, Supplier Part Number 1=311-1016-1-ND, Temperature="-55°C ~ 125°C", Tolerance=±5%, Voltage Rating=50V, Assembly Type=SMD, CreatedBy/Date="Philippe Arsenault/ 2020-07-24", Cryo=UNKNOWN, GRAMS Lib Spec=2.8, HelpURL=https://www.yageo.com/upload/media/product/productsearch/datasheet/mlcc/UPY-GP_NP0_16V-to-50V_18.pdf, Magnetic Material=Unknown, Part Number #1=CC0402JRNPO9BN120, Polarized=NO, Supplier 1=Digi-Key
C18A1 C18B1 C19A1 C19B1 C38: library part CAP_CER_CC0402KRX7R9BB102, "CAP - CER 1nF 10% 50V X7R - 0402", Manufacturer #1=Yageo, Package=0402, Supplier Part Number 1=311-1036-1-ND, Temperature="-55°C ~ 125°C", Tolerance=10%, Voltage Rating=50V, Assembly Type=SMD, CreatedBy/Date="Jonathan Bouchard 2019-04-06", Cryo=UNKNOWN, GRAMS Lib Spec=2.8, HelpURL=http://www.yageo.com/documents/recent/UPY-GPHC_X7R_6.3V-to-50V_18.pdf, Magnetic Material=UNKNOWN, Part Number #1=CC0402KRX7R9BB102, Polarized=NO, Supplier 1=Digi-Key, VerifiedBy="Nicolas V. (2019-04-30)"
C18A2 C18B2 C19A2 C19B2: library part CAP_CER_CL05B103KB5NFNC, "CAP - CER 10nF ±10% 50V X7R - 0402", Manufacturer #1="Samsung Electro-Mechanics", Package=0402, Supplier Part Number 1=1276-1499-1-ND, Temperature="-55°C ~ 125°C", Tolerance=10%, Voltage Rating=50V, Assembly Type=SMD, CreatedBy/Date="Keven Deslandes - 2018/11/20", Cryo=UNKNOWN, GRAMS Lib Spec=2.8, HelpURL=http://www.samsungsem.com/kr/support/product-search/mlcc/CL05B103KB5NFNC.jsp, Magnetic Material=Unknown, Part Number #1=CL05B103KB5NFNC, Polarized=No, Supplier 1=Digi-Key, VerifiedBy="Nicolas Roy - 2018/12/11"
C30 C34: library part CAP_CER_CL05A105KL5NRNC, "CAP - CER 1uF 10% 35V X5R - 0402", Manufacturer #1="Samsung Electro-Mechanics", Package=0402, Supplier Part Number 1=1276-6796-1-ND, Temperature="-55°C ~ 85°C", Tolerance=10%, Voltage Rating=35V, Assembly Type=SMD, CreatedBy/Date="Nicolas Roy 2018-10-03", Cryo=UNKNOWN, GRAMS Lib Spec=2.8, HelpURL=http://www.samsungsem.com/kr/support/product-search/mlcc/__icsFiles/afieldfile/2018/06/19/CL05A105KL5NRNC.pdf, Magnetic Material=Unknown, Part Number #1=CL05A105KL5NRNC, Polarized=NO, Supplier 1=Digi-Key, VerifiedBy="Caroline Paulin - 18 janv 2019"
C31 C35 C39 C40: library part CAP_CER_CL05A104KA5NNNC, "CAP - CER 0.1uF 10% 25V X5R - 0402", Manufacturer #1="Samsung Electro-Mechanics", Package=0402, Supplier Part Number 1=1276-1043-1-ND, Temperature="-55°C ~ 85°C", Tolerance=10%, Voltage Rating=25V, Assembly Type=SMD, CreatedBy/Date="Keven Deslandes - 2018/09/26", Cryo=UNKNOWN, GRAMS Lib Spec=2.8, HelpURL=http://www.samsungsem.com/kr/support/product-search/mlcc/CL05A104KA5NNNC.jsp, Magnetic Material=Unknown, Part Number #1=CL05A104KA5NNNC, Polarized=NO, Supplier 1=Digi-Key, VerifiedBy="Nicolas Roy - 2018/12/11"
C32 C36 C37: library part CAP_CER_C0402C103M5RACTU, "CAP - CER 10nF 50V X7R 20% - 0402", Manufacturer #1=KEMET, Package=0402, Supplier Part Number 1=399-7760-1-ND, Temperature="-55°C ~ 125°C", Tolerance=20%, Voltage Rating=50V, Assembly Type=SMD, CreatedBy/Date="Keven Deslandes - 2018/11/09", Cryo=UNKNOWN, GRAMS Lib Spec=2.8, HelpURL=https://api.kemet.com/component-edge/download/datasheet/C0402C103M5RACTU.pdf, Magnetic Material=Unknown, Part Number #1=C0402C103M5RACTU, Polarized=No, Supplier 1=Digi-Key, VerifiedBy="Nicolas Roy - 2018/12/11"
C33: library part CAP_CER_GRM21BC71E106KE11L, "CAP - CER 10UF 10% 25V X7S - 0805", Manufacturer #1=Murata, Package=0805, Supplier Part Number 1=490-10496-1-ND, Temperature="-55°C ~ 125°C", Tolerance=10%, Voltage Rating=25V, Assembly Type=SMD, CreatedBy/Date="Caroline Paulin / 8 août 2018", Cryo=UNKNOWN, GRAMS Lib Spec=2.8, HelpURL=https://search.murata.co.jp/Ceramy/image/img/A01X/G101/ENG/GRM21BC71E106KE11-01.pdf, Magnetic Material=Unknown, Part Number #1=GRM21BC71E106KE11L, Polarized=NO, Supplier 1=Digi-Key, VerifiedBy="Nicolas V. (2019-01-22)"
C41: library part CAP_CER_CC0402CRNPO9BN3R0, "CAP - CER 3pF 50V ±0.25pF 1/16W C0G, NP0 - 0402", Manufacturer #1=Yageo, Package=0402, Power Max=1/16W, Supplier Part Number 1=311-1007-1-ND, Temperature="-55°C ~ 125°C", Tolerance=±0.25pF, Voltage Rating=50V, Assembly Type=SMD, CreatedBy/Date="Philippe Arsenault/ 2020-07-24", Cryo=UNKNOWN, GRAMS Lib Spec=2.8, HelpURL=https://www.yageo.com/upload/media/product/productsearch/datasheet/mlcc/UPY-GP_NP0_16V-to-50V_18.pdf, Magnetic Material=Unknown, Part Number #1=CC0402CRNPO9BN3R0, Polarized=NO, Supplier 1=Digi-Key
CA1 CA2 CB1 CB2: library part CAP_CER_C3225X7R1E226M250AB, "CAP - CER 22UF 20% 25V X7R - 1210", Manufacturer #1="TDK Corporation", Package=1210, Supplier Part Number 1=445-181602-1-ND, Temperature="-55°C ~ 125°C", Tolerance=20%, Voltage Rating=25V, Assembly Type=SMD, CreatedBy/Date="Nicolas V. (2019-12-11)", Cryo=UNKNOWN, GRAMS Lib Spec=2.8, HelpURL=https://product.tdk.com/info/en/documents/chara_sheet/C3225X7R1E226M250AB.pdf, Magnetic Material=Unknown, Part Number #1=C3225X7R1E226M250AB, Polarized=No, Supplier 1=Digi-Key, VerifiedBy="Nicolas V. (2019-12-11)"
D1 D35A D35B D36A D36B D37A D37B D38A D38B: library part LED_SML-D12P8WT86, "LED - GREEN DIFFUSED 0603 SMD - 0603", Current Rating=1-20mA, Manufacturer #1="Rohm Semiconductor", Package=0603, Supplier Part Number 1=511-1579-2-ND, Temperature="-40 ~ 85 °C", Voltage Rating="2.2V (Forward), 5V (max Reverse)", Assembly Type=SMD, CreatedBy/Date="Keven Deslandes - 2018/11/21", Cryo=UNKNOWN, GRAMS Lib Spec=2.8, HelpURL=https://d1d2qsbl8m0m72.cloudfront.net/en/products/databook/datasheet/opto/led/chip_mono/sml-d12x8_d13x8-e.pdf, Magnetic Material=Unknown, Note="Operate at 2mA", Part Number #1=SML-D12P8WT86, Polarized=Yes, Supplier 1=Digi-Key, VerifiedBy="Caroline Paulin - 13 février 2019"
J1A J1B: library part CON_UMC_128-0711-201, "CON - UMC JACK STR 50 OHM - SMD", Manufacturer #1="Cinch Connectivity Solutions Johnson", Package=SMD, Supplier Part Number 1=J983CT-ND, Temperature="-40°C ~ 90°C", Voltage Rating=200V, Assembly Type=SMD, CreatedBy/Date="Keven Desandes - 2018/09/27", Cryo=UNKNOWN, GRAMS Lib Spec=2.8, HelpURL=https://belfuse.com/resources/cinch-brochures/CCS%20Johnson%20UMC%20Ultra%20Miniature%20Connectors.pdf, Note=Straight, Part Number #1=128-0711-201, Polarized=No, Supplier 1=Digi-Key, VerifiedBy="Caroline Paulin - 23 janv 2019"
L18A L18B L19A L19B: library part FER_BLM15AG601SN1D, "FER - FERRITE BEAD 600 OHM@100MHz - 0402", Current Rating=300mA, Manufacturer #1=Murata, Package=0402, Supplier Part Number 1=490-1006-1-ND, Temperature="-55°C ~ 125°C", Assembly Type=SMD, CreatedBy/Date="Philippe Arsenault/2020-07-24", Cryo=UNKNOWN, GRAMS Lib Spec=2.8, HelpURL=https://www.murata.com/en-us/products/productdata/8796740059166/ENFA0018.pdf, Magnetic Material=YES, Part Number #1=BLM15AG601SN1D, Polarized=NO, Supplier 1=Digi-Key
R3: library part RES_CRCW0603470RFKEAC, "RES - 470R 1% 1/10W - 0603", Manufacturer #1="Vishay Dale", Package=0603, Power Max=1/10W, Supplier Part Number 1=541-4038-1-ND, Temperature="-55°C ~ 155°C", Tolerance=1%, Voltage Rating=75V, Assembly Type=SMD, CreatedBy/Date="Philippe Arsenault/2020-07-14", GRAMS Lib Spec=2.8, HelpURL=https://www.vishay.com/docs/28773/crcwce3.pdf, Magnetic Material=Unknown, Part Number #1=CRCW0603470RFKEAC, Polarized=No, Supplier 1=Digi-Key
R4: library part RES_RR0816P-103-D, "RES - 10k OHM 0.5% 1/16W - 0603", Manufacturer #1=Susumu, Package=0603, Power Max=1/16W, Supplier Part Number 1=RR08P10.0KDCT-ND, Temperature="-55°C ~ 125°C", Tolerance=0.5%, Assembly Type=SMD, CreatedBy/Date="L-P Gauthier / 2018-05-29", Cryo=UNKNOWN, GRAMS Lib Spec=2.8, HelpURL=https://www.susumu.co.jp/common/pdf/n_catalog_partition05_en.pdf, Magnetic Material=Unknown, Part Number #1=RR0816P-103-D, Polarized=NO, Supplier 1=Digi-Key, VerifiedBy="Caroline Paulin - 28 sept 2018"
R5: library part RES_RC0603JR-070RL, "RES - 0 ohm jumper 1/10W - 0603", Manufacturer #1=Yageo, Package=0603, Power Max=1/10W, Supplier Part Number 1=311-0.0GRCT-ND, Temperature="-55°C ~ 155°C", Voltage Rating=-, Assembly Note=DNI, Assembly Type=SMD, CreatedBy/Date="L-P Gauthier 2018-10-30", Cryo=UNKNOWN, GRAMS Lib Spec=2.8, HelpURL=http://www.yageo.com/documents/recent/PYu-RC_Group_51_RoHS_L_9.pdf, Magnetic Material=Unknown, Part Number #1=RC0603JR-070RL, Polarized=No, Supplier 1=Digi-Key, VerifiedBy="Caroline Paulin  - 5/11/2018"
R5A R5B: library part RES_RC0402FR-0711KL, "RES - 11K 1% 1/16W - 0402", Manufacturer #1=Yageo, Package=0402, Power Max=1/16W, Supplier Part Number 1=311-11.0KLRCT-ND, Temperature="-55°C ~ 155°C", Tolerance=1%, Voltage Rating=50V, Assembly Type=SMD, CreatedBy/Date="Keven Deslandes 2018-10-15", Cryo=UNKNOWN, GRAMS Lib Spec=2.8, HelpURL=http://www.yageo.com/documents/recent/PYu-RC_Group_51_RoHS_L_9.pdf, Magnetic Material=Unknown, Part Number #1=RC0402FR-0711KL, Polarized=No, Supplier 1=Digi-Key, VerifiedBy="Carolilne Paulin - 18/12/2018"
R6: library part RES_RC0603FR-071KL, "RES - 1K 1% 1/10W - 0603", Manufacturer #1=Yageo, Package=0603, Power Max=1/10W, Supplier Part Number 1=311-1.00KHRCT-ND, Temperature="-55°C ~ 155°C", Tolerance=1%, Voltage Rating=75V, Assembly Type=SMD, CreatedBy/Date="Hubert Dube / 22-07-21", GRAMS Lib Spec=2.8, HelpURL=https://www.yageo.com/upload/media/product/productsearch/datasheet/rchip/PYu-RC_Group_51_RoHS_L_11.pdf, Magnetic Material=Unknown, Part Number #1=RC0603FR-071KL, Polarized=No, Supplier 1=Digi-Key
R7: library part RES_RC0402FR_TEMPLATE, "RES - XXXX 1% 1/16W - 0402", Manufacturer #1=Yageo, Package=0402, Power Max=1/16W, Temperature="-55°C ~ 155°C", Tolerance=1%, Voltage Rating=50V, Assembly Type=SMD, CreatedBy/Date="Louis-Daniel Gaulin", GRAMS Lib Spec=2.8c, Magnetic Material=Unknown, Polarized=No, Supplier 1=Digi-Key
R8A R8B: library part RES_RC0402FR-0716KL, "RES - 16k OHM 1% 1/16W - 0402", Manufacturer #1=Yageo, Package=0402, Power Max=1/16W, Supplier Part Number 1=311-16.0KLRCT-ND, Temperature="-55°C ~ 155°C", Tolerance=1%, Voltage Rating=50V, Assembly Type=SMD, CreatedBy/Date="Nicolas Roy/18 oct. 2018", Cryo=UNKNOWN, GRAMS Lib Spec=2.8, HelpURL=http://www.yageo.com/documents/recent/PYu-RC_Group_51_RoHS_L_9.pdf, Magnetic Material=Unknown, Part Number #1=RC0402FR-0716KL, Polarized=NO, Supplier 1=Digi-Key, VerifiedBy="Caroline Paulin - 18/12/2018"
R12A R12B: library part RES_RC0402FR-07270RL, "RES - 270R 1% 1/16W - 0402", Manufacturer #1=Yageo, Package=0402, Power Max=1/16W, Supplier Part Number 1=311-270LRCT-ND, Temperature="-55°C ~ 155°C", Tolerance=1%, Voltage Rating=50V, Assembly Type=SMD, CreatedBy/Date="Philippe Arsenault 2020-07-24", GRAMS Lib Spec=2.8c, HelpURL=https://www.yageo.com/upload/media/product/productsearch/datasheet/rchip/PYu-RC_Group_51_RoHS_L_10.pdf, Magnetic Material=Unknown, Part Number #1=RC0402FR-07270RL, Polarized=No, Supplier 1=Digi-Key
R30 R31: library part RES_RC0402FR-0720KL, "RES - 20K 1% 1/16W  - 0402", Manufacturer #1=Yageo, Package=0402, Power Max=1/16W, Supplier Part Number 1=311-20.0KLRCT-ND, Temperature="-55°C ~ 155°C", Tolerance=1%, Voltage Rating=50V, Assembly Type=SMD, CreatedBy/Date="Keven Deslandes 2018-10-18", Cryo=UNKNOWN, GRAMS Lib Spec=2.8, HelpURL=http://www.yageo.com/documents/recent/PYu-RC_Group_51_RoHS_L_10.pdf, Magnetic Material=Unknown, Part Number #1=RC0402FR-0720KL, Polarized=No, Supplier 1=Digi-Key, VerifiedBy="Caroline Paulin - 7 janv 2019"
R32 R33: library part RES_RC0402FR-070RL, "RES - 0R 1/16W 1A  - 0402", Current Rating=1A, Manufacturer #1=Yageo, Package=0402, Power Max=1/16W, Supplier Part Number 1=311-0.0LRCT-ND, Temperature="-55°C ~ 155°C", Voltage Rating=50V, Assembly Type=SMD, CreatedBy/Date="Keven Deslandes 2018-09-12", Cryo=UNKNOWN, GRAMS Lib Spec=2.8, HelpURL=http://www.yageo.com/documents/recent/PYu-RC_Group_51_RoHS_L_10.pdf, Magnetic Material=Unknown, Part Number #1=RC0402FR-070RL, Polarized=No, Supplier 1=Digi-Key, VerifiedBy="Caroline Paulin - 27 fév 2019"
R35A R35B R36A R36B R37A R37B R38A R38B: library part RES_RC0402FR-07470RL, "RES - 470R 1% 1/16W - 0402", Manufacturer #1=Yageo, Package=0402, Power Max=1/16W, Supplier Part Number 1=311-470LRCT-ND, Temperature="-55°C ~ 155°C", Tolerance=1%, Voltage Rating=50V, Assembly Type=SMD, CreatedBy/Date="Philippe Arsenault 2020-07-24", GRAMS Lib Spec=2.8c, HelpURL=https://www.yageo.com/upload/media/product/productsearch/datasheet/rchip/PYu-RC_Group_51_RoHS_L_10.pdf, Magnetic Material=Unknown, Part Number #1=RC0402FR-07470RL, Polarized=No, Supplier 1=Digi-Key
TP_D1 TP_D2 TP_TCXO: library part TPO_TH_ROUND_100MIL, "TPO - TEST POINT ROUND TH  - 100MIL", Package="100 MIL round", Assembly Type=NONE, CreatedBy/Date="Louis-Daniel Gaulin/ 14/01/2020", Cryo=UNKNOWN, GRAMS Lib Spec=2.8c, Magnetic Material=NO, VerifiedBy="C.Paulin - 21/01/2020"
U1: library part COM_BUF_LMK1C1102PWR, "COM - BUF - Clock buffer 3V3, 2V5, 1V8 2 output _TI", Current Rating="Input +-20mA ; Output +- 50mA", Manufacturer #1=TI, Package="TSSOP 8 pin", Power Max=132mW, Temperature="–40°C to 125°C", Voltage Rating="3V3, 2V5, 1V8", Assembly Type=SMT, CreatedBy/Date="Philippe Arsenault/20-07-2020", Cryo=No, GRAMS Lib Spec=2.8, HelpURL=https://www.ti.com/lit/ds/symlink/lmk1c1102.pdf?ts=1595262014854&ref_url=https%253A%252F%252Fwww.ti.com%252Fproduct%252FLMK1C1102%253Futm_source%253Dgoogle%2526utm_medium%253Dcpc%2526utm_campaign%253Dasc-null-null-GPN_EN-cpc-pf-google-wwe%2526utm_content%253DLMK1C1102%2526ds_k%253DLMK1C1102%2526DCM%253Dyes%2526gclid%253DCjwKCAjwgdX4BRB_EiwAg8O8HUIvo-ksMfq8YInqTklLXWuMoCGXxsnhq04Fqr4kdDFQPSc0fYG9iRoCPvAQAvD_BwE%2526gclsrc%253Daw.ds, Magnetic Material=Unknown, Part Number #1=LMK1C1102PWR, Polarized=Yes
U5: library part MEM_FLASH_MX25L3233FZNI-08G, "MEM - EFLASH 32Mb I2C 133MHZ - 8-WSON", Package=8-WSON, Supplier Part Number 1=MX25L3233FZNI-08G-ND, Temperature="-40°C ~ 85°C", Voltage Rating="2.65V ~ 3.6V", Assembly Type=SMD, CreatedBy/Date="Hubert Dube - 22/07/01", Cryo=UNKNOWN, GRAMS Lib Spec=2.8, HelpURL=https://www.macronix.com/Lists/Datasheet/Attachments/7426/MX25L3233F,%203V,%2032Mb,%20v1.6.pdf, Magnetic Material=UNKNOWN, Manufacturer #1=MX25L3233FZNI-08G, Part Number #1=MX25L3233FZNI-08G, Polarized=YES, Supplier 1=Digi-Key
U_A U_B: library part COM_XCV_DW1000-I-TR13, "COM - UWB DECAWAVE (qorvo)", Current Rating="Rx 64mA/Tx 31mA", Manufacturer #1=Decawave, Manufacturer #2=Qorvo, Package="QFN 48", Supplier Part Number 1=1479-1001-1-ND, Temperature="-40°C ~ 85°C", Voltage Rating="2.8 - 3.6 V", Assembly Type=SMT, CreatedBy/Date="Philippe Arsenault/13-07-2020", Cryo=No, GRAMS Lib Spec=2.8, HelpURL=https://www.decawave.com/sites/default/files/resources/DW1000-Datasheet-V2.12.pdf, Magnetic Material=Unknown, Part Number #1=DW1000-I-TR13, Polarized=Yes, Supplier 1=Digi-Key
Y1: library part OSC_ASTXR-12-38.400MHz-514054-T, "OSC - XTAL - ASTXR-12-38.400MHz-514054-T - 38.4MHz TXCO - Clipped sine - 3V3 +-0.5ppm UWB application", Current Rating=2mA, Manufacturer #1="Abracon LLC", Manufacturer #2=Rakon, Package=6-SMD, Supplier Part Number 1=535-13192-1-ND, Temperature="-40°C ~ 85°C", Voltage Rating=3.3V, Assembly Type=SMT, CreatedBy/Date="Philippe Arsenault/18-07-2020", Cryo=No, GRAMS Lib Spec=2.8, HelpURL=https://4donline.ihs.com/images/VipMasterIC/IC/ABRC/ABRC-S-A0001399357/ABRC-S-A0001399357-1.pdf?hkey=52A5661711E402568146F3353EA87419, Magnetic Material=Unknown, Part Number #1=ASTXR-12-38.400MHz-514054-T, Polarized=Yes, Supplier 1=Digi-Key

## Nets (pads, with @x,y where several pads share a name; then routed paths per layer and width w, separated by ;. In a path a pad name is that pad's centre, name@x,y a point inside that pad or via, vN(x,y) a via of type N, cw(c..) or ccw(c..) an arc to the next point about the centre after c; other vN are vias at no path point)
1V8_A: C26A.1 C48A.1 U_A.26 U_A.48
1V8_B: C26B.1 C48B.1 U_B.26 U_B.48
3V3: C3.2 C4.2 C5.2 C7.2 C9.2 C10.2 C11.2 C12.2 R4.2 R5.2
3V3_SDIO: C8.2 R5.1 U5.8
3V3_WIFI: C6.2
32K_XN: R7.2
32K_XP: R7.1
CLKBUF: R33.2 U1.8
GND: C3.1 C4.1 C4A.1 C4B.1 C5.1 C6.1 C6A.2 C6B.2 C7.1 C7A.2 C7B.2 C8.1 C9.1 C9A.2 C9B.2 C10.1 C10A.2 C10B.2 C11.1 C11A.2 C11B.2 C12.1 C15A.2 C15B.2 C18A1.1 C18A2.1 C18A3.1 C18A.1 C18B1.1 C18B2.1 C18B3.1 C18B.1 C19A1.1 C19A2.1 C19A3.1 C19A.1 C19B1.1 C19B2.1 C19B3.1 C19B.1 C20A.2 C20B.2 C25A.2 C25B.2 C26A.2 C26B.2 C28A.2 C28B.2 C30.1 C31.1 C31A.2 C31B.2 C32.1 C33.1 C34.1 C35.1 C41.1 C42A.2 C42B.2 C44A.2 C44B.2 C47A.2 C47B.2 C48A.2 C48B.2 CA1.1 CA2.1 CB1.1 CB2.1 D1.K D35A.K D35B.K D36A.K D36B.K D37A.K D37B.K D38A.K D38B.K J1A.2 J1A.3 J1B.2 J1B.3 R5A.1 R5B.1 R31.1 U1.4 U5.4 U_A.22 U_A.32 U_A.43 U_A.46 U_A.49 U_B.22 U_B.32 U_B.43 U_B.46 U_B.49 Y1.1 Y1.3
LED_RX_A: R36A.2 U_A.36
LED_RX_B: R36B.2 U_B.36
LED_RX_OK_A: R38A.2 U_A.38
LED_RX_OK_B: R38B.2 U_B.38
LED_SFD_A: R37A.2 U_A.37
LED_SFD_B: R37B.2 U_B.37
LED_TX_A: R35A.2 U_A.35
LED_TX_B: R35B.2 U_B.35
LNA_IN: 
NetC4A_2: C4A.2 U_A.4
NetC4B_2: C4B.2 U_B.4
NetC6A_1: C6A.1 U_A.6
NetC6B_1: C6B.1 U_B.6
NetC7A_1: C7A.1 U_A.7
NetC7B_1: C7B.1 U_B.7
NetC8A1_2: C8A1.2 C8A.2
NetC8A_1: C8A.1 R8A.1 U_A.8
NetC8B1_2: C8B1.2 C8B.2
NetC8B_1: C8B.1 R8B.1 U_B.8
NetC10A_1: C10A.1 U_A.10
NetC10B_1: C10B.1 U_B.10
NetC12A1_1: C12A1.1 R12A.1
NetC12A_1: C12A.1 R12A.2 U_A.12
NetC12B1_1: C12B1.1 R12B.1
NetC12B_1: C12B.1 R12B.2 U_B.12
NetC13_2: R4.1
NetC16A_1: C16A.1
NetC16B_1: C16B.1
NetC17A_1: C17A.1
NetC17B_1: C17B.1
NetC18_1: 
NetC18_2: 
NetC18A1_2: C18A1.2 C18A2.2 C18A3.2 C18A.2 L18A.2 U_A.18
NetC18B1_2: C18B1.2 C18B2.2 C18B3.2 C18B.2 L18B.2 U_B.18
NetC19A1_2: C19A1.2 C19A2.2 C19A3.2 C19A.2 L19A.2 U_A.19
NetC19B1_2: C19B1.2 C19B2.2 C19B3.2 C19B.2 L19B.2 U_B.19
NetC20A_1: C20A.1 U_A.20
NetC20B_1: C20B.1 U_B.20
NetC28A_1: C28A.1 U_A.28
NetC28B_1: C28B.1 U_B.28
NetC31A_1: C31A.1 U_A.31
NetC31B_1: C31B.1 U_B.31
NetC36_2: C36.2 C37.2 U1.3
NetC38_2: C38.2 Y1.4
NetC39_1: C39.1
NetC40_2: C40.2
NetC42A_1: C42A.1 U_A.42
NetC42B_1: C42B.1 U_B.42
NetC44A_1: C44A.1 U_A.44
NetC44B_1: C44B.1 U_B.44
NetD1_A: D1.A R3.1
NetD2_1: 
NetD2_3: 
NetD2_4: 
NetD2_5: 
NetD35A_A: D35A.A R35A.1
NetD35B_A: D35B.A R35B.1
NetD36A_A: D36A.A R36A.1
NetD36B_A: D36B.A R36B.1
NetD37A_A: D37A.A R37A.1
NetD37B_A: D37B.A R37B.1
NetD38A_A: D38A.A R38A.1
NetD38B_A: D38B.A R38B.1
NetJ1A_1: J1A.1
NetJ1B_1: J1B.1
NetR5A_2: R5A.2 U_A.5
NetR5B_2: R5B.2 U_B.5
NetR6_1: R6.1
NetR6_2: R6.2
NetR9_1: 
NetR9_2: U5.6
NetR10_1: 
NetR10_2: 
NetR12_1: 
NetR32_1: R32.1 R33.1
NetR32_2: R32.2
NetU2_3: 
NetU2_6: 
NetU3_2: 
NetU4_14: 
NetU4_15: 
NetU4_23: 
NetU4_28: U5.7
NetU4_29: U5.3
NetU4_30: 
NetU4_32: U5.2
NetU4_33: U5.5
NetU4_40: 
NetU5_1: U5.1
NetU_A_21: U_A.21
NetU_A_23: U_A.23
NetU_A_24: U_A.24
NetU_A_27: U_A.27
NetU_A_30: U_A.30
NetU_A_33: U_A.33
NetU_A_34: U_A.34
NetU_A_39: U_A.39
NetU_A_40: U_A.40
NetU_A_41: U_A.41
NetU_A_45: U_A.45
NetU_B_21: U_B.21
NetU_B_23: U_B.23
NetU_B_24: U_B.24
NetU_B_27: U_B.27
NetU_B_30: U_B.30
NetU_B_33: U_B.33
NetU_B_34: U_B.34
NetU_B_39: U_B.39
NetU_B_40: U_B.40
NetU_B_41: U_B.41
NetU_B_45: U_B.45
REFCLK_A: C36.1 U_A.3
REFCLK_B: C37.1 U_B.3
RF_NA: C17A.2 U_A.17
RF_NB: C17B.2 U_B.17
RF_PA: C16A.2 U_A.16
RF_PB: C16B.2 U_B.16
SYNC: U_A.29 U_B.29
TCXO_OUT: C38.1 C41.2 R30.1 R31.2 U1.1
USER_LED: R3.2
VCC: C15A.1 C15B.1 C25A.1 C25B.1 C47A.1 C47B.1 CA1.2 CA2.2 CB1.2 CB2.2 L18A.1 L18B.1 L19A.1 L19B.1 TP_D1.1 TP_D2.1 TP_TCXO.1 U_A.15 U_A.25 U_A.47 U_B.15 U_B.25 U_B.47
VDD_TXCO: C30.2 C31.2 C32.2 C33.2 C34.2 C35.2 C39.2 C40.1 R30.2 U1.2 U1.6 Y1.6
VDDCLK_A: C8A1.1 C9A.1 R8A.2 U_A.9
VDDCLK_B: C8B1.1 C9B.1 R8B.2 U_B.9
VDDVCO_A: C11A.1 C12A1.2 C12A.2 U_A.11
VDDVCO_B: C11B.1 C12B1.2 C12B.2 U_B.11
XTAL_N: 
XTAL_P: 
pads on no net: U1.5 U1.7 U_A.1 U_A.2 U_A.13 U_A.14 U_B.1 U_B.2 U_B.13 U_B.14

## Polygon pours and split planes (outlines as drawn)
no net on Top "Top-M2_SOURCE_-HV_B 1" (solid, pour order 294): -97.28,-83.24
no net on Top "Top-No Net" (solid, pour order 293): 270.43,880.75
no net on Top "Top-No Net 1" (solid, pour order 292): 242.9,903.19
no net on Top "Top-No Net 2" (solid, pour order 291): 250.4,917.97
no net on Top "Top-No Net 3" (solid, pour order 290): 246.68,902.24
no net on Top "Top-No Net 4" (solid, pour order 289): -472.73,995.93
no net on Top "Top-No Net 5" (solid, pour order 288): -469.01,1011.67
no net on Top "Top-No Net 6" (solid, pour order 287): -476.51,996.88
no net on Top "Top-No Net 7" (solid, pour order 286): -448.98,974.44
no net on Top "Top-No Net 8" (solid, pour order 285): 375.58,880.75
no net on Top "Top-No Net 9" (solid, pour order 284): 348.05,903.19
no net on Top "Top-No Net 10" (solid, pour order 283): 355.54,917.97
no net on Top "Top-No Net 11" (solid, pour order 282): 351.83,902.24
no net on Top "Top-No Net 12" (solid, pour order 281): -1807.03,-950.46
no net on Bottom "Bottom-No Net" (solid, pour order 457): 1351.66,989.39
no net on GND_1 (split plane): 5749.23,20.1 20.1,20.1 20.1,2538.96 5749.23,2539.42
no net on GND_2 (split plane): 5749.23,20.1 20.1,20.1 20.1,2538.96 5749.23,2539.42
no net on PWR (split plane): 5749.23,20.1 20.1,20.1 20.1,2538.96 5749.23,2539.42